# Altium PCB RelayBoard.PcbDoc
Units mil, origin at the board's own origin, x right, y up, seen from the top; angles counter-clockwise.
Board outline 3700.79 x 5314.96 mil, 2 copper layers (Top Layer, Bottom Layer); 22 components, 39 nets, 78 pads, 0 vias.
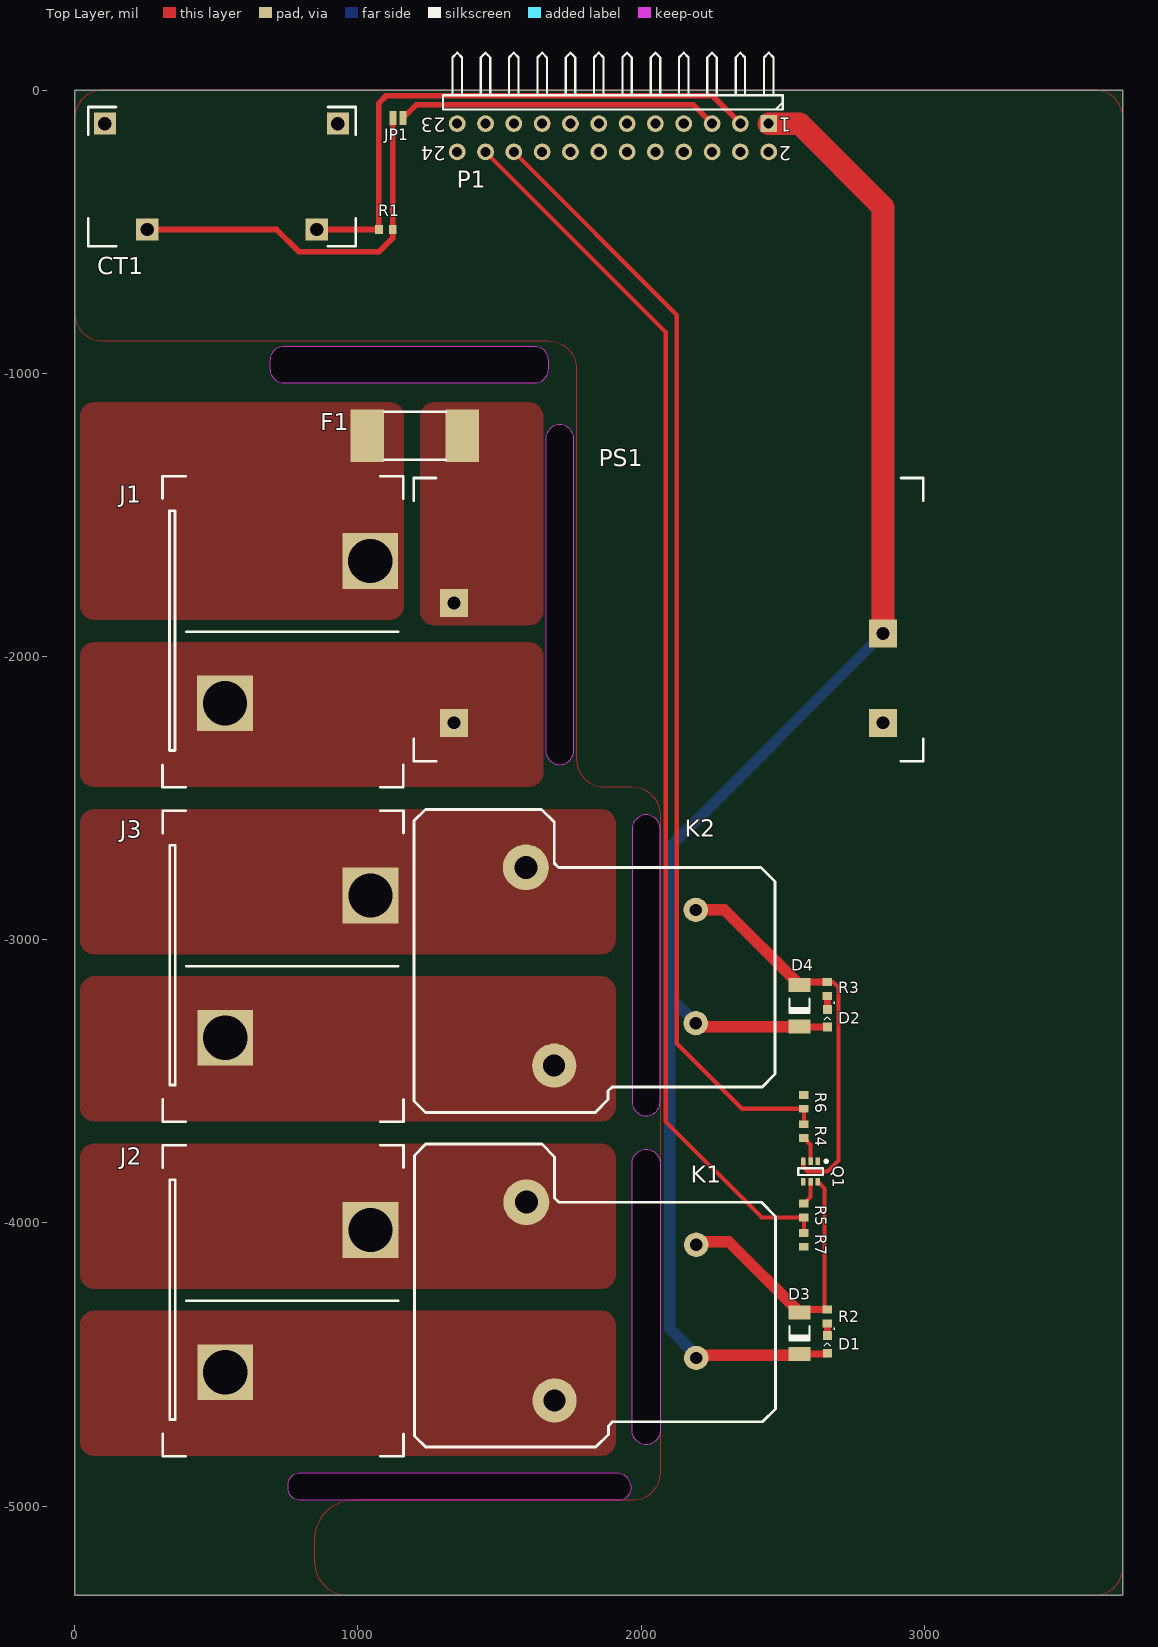
[diagram p0: Top Layer view]
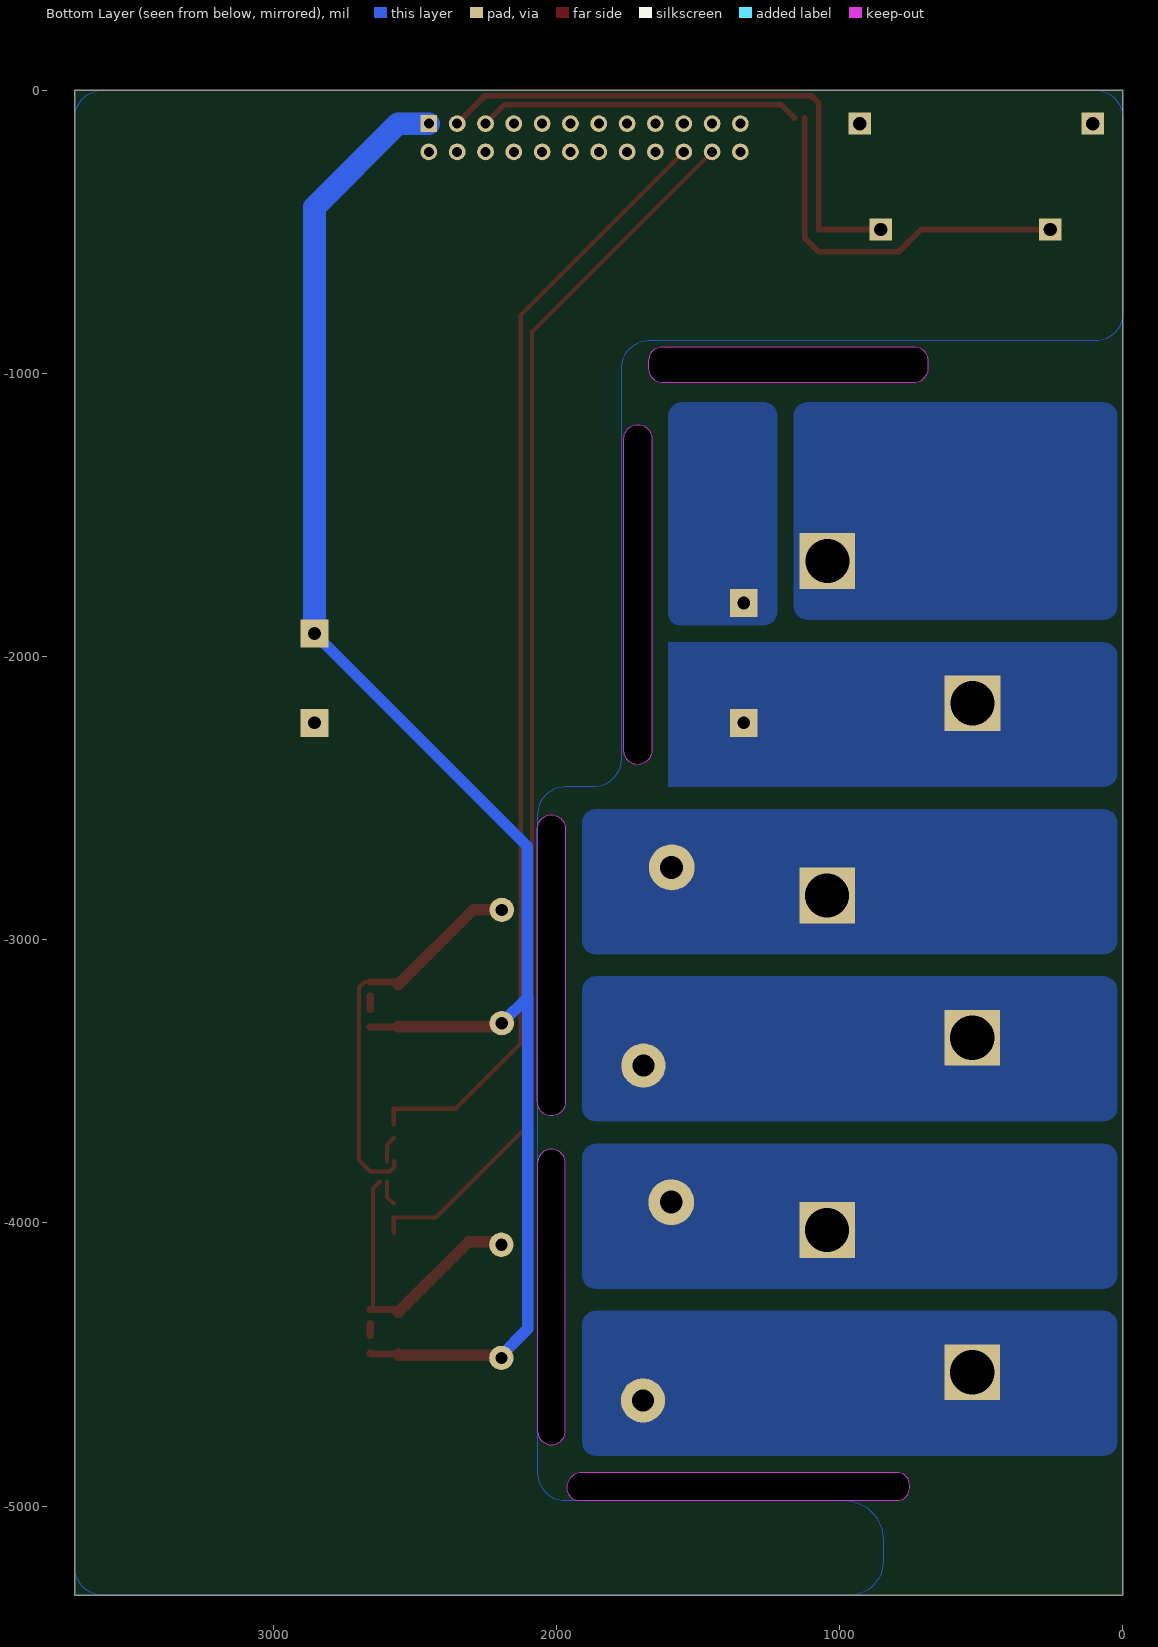
[diagram p1: Bottom Layer view, seen from below]

## Layer stack, top to bottom
Top Solder: solder mask 0.4, Solder Resist, Dk 3.5
Top Layer: signal copper 1.4
Dielectric 1: dielectric 12.6, FR-4, Dk 4.8
Bottom Layer: signal copper 1.4
Bottom Solder: solder mask 0.4, Solder Resist, Dk 3.5

## Board outline
0,0 3700.79,0 3700.79,-5314.96 0,-5314.96
cut-out: -8015.75,-5388.78 -8015.75,-5389.76 -8012.8,-5386.81 -8010.83,-5386.81 -8011.81,-5385.83
cut-out: 2066.93,-3789.37 2066.93,-4734.25 cw(c2017.72,-4734.25) 2017.72,-4783.46 cw(c2017.72,-4734.25) 1968.5,-4734.25 1968.5,-3789.37 cw(c2017.72,-3789.37) 2017.72,-3740.16 cw(c2017.72,-3789.37)
cut-out: 2017.72,-3622.05 ccw(c2017.72,-3572.84) 2066.93,-3572.83 2066.93,-2608.27 ccw(c2017.72,-2608.27) 2017.72,-2559.06 ccw(c2017.72,-2608.27) 1968.5,-2608.27 1968.5,-3572.83 ccw(c2017.72,-3572.84)
cut-out: 797.24,-4881.89 1909.45,-4881.89 cw(c1909.45,-4936.02) 1963.58,-4936.02 cw(c1919.29,-4936.02) 1919.29,-4980.31 797.24,-4980.32 cw(c797.24,-4936.02) 752.95,-4936.02 752.95,-4926.18 cw(c797.24,-4926.18)
cut-out: 1712.6,-2381.89 ccw(c1712.6,-2332.68) 1761.81,-2332.68 1761.81,-1230.31 ccw(c1712.6,-1230.31) 1712.6,-1181.1 ccw(c1712.6,-1230.31) 1663.39,-1230.32 1663.39,-2332.68 ccw(c1712.6,-2332.68)
cut-out: 688.98,-954.72 688.98,-984.25 ccw(c738.19,-984.25) 738.19,-1033.46 1624.02,-1033.46 ccw(c1624.02,-984.25) 1673.23,-984.25 1673.23,-954.72 ccw(c1624.02,-954.72) 1624.02,-905.51 738.19,-905.51 ccw(c738.19,-954.72)

## Design rules (kind name [scope] priority, off if disabled: settings)
Clearance "Stitching GND" [IsStitchingVia and InNet('GND') vs (IsVia and (Not IsStitchingVia)) Or IsPad] p1: gap=12 ignorepadtopadclearanceinfootprint=FALSE
Clearance [All] p2: gap=6 ignorepadtopadclearanceinfootprint=FALSE except(0: Arc-Hole Track-Hole SMDPad-Hole THPad-Hole Via-Hole Fill-Hole Poly-Hole Region-Hole Text-Hole)
Clearance Clearance_HV_300V [All vs InNet('NetJ3_1') OR InNet('NetJ3_2') OR InNet('NetJ4_1') OR InNet('NetJ4_2') OR InNet('NetJ1_2') OR InNet('NetF1_1') OR InNet('NetF1_2')] p3: gap=15.75 ignorepadtopadclearanceinfootprint=FALSE except(0: Arc-Hole Track-Hole SMDPad-Hole THPad-Hole Via-Hole Fill-Hole Poly-Hole Region-Hole Text-Hole)
HoleSize [All] p1: absolutevalues=TRUE maxlimit=100 minlimit=11.81 maxpercent=80.000 minpercent=20.000
PolygonConnect [All] p1: connectstyle=Direct reliefconductorwidth=20 reliefentries=4 polygonreliefangle="45 Angle" airgapwidth=10
RoutingVias [All] p1: holewidth=11.81 width=50 viastyle="Through Hole" minholewidth=11.81 minwidth=50 maxholewidth=200 maxwidth=50
SolderMaskExpansion [All] p1: expansion=4
Width [All] p1: maxlimit=100 minlimit=6 preferedwidth=10
Width Width_HV_1A [InNet('NetJ1_2') OR InNet('NetF1_1') OR InNet('NetF1_2')] p2: maxlimit=30 minlimit=14 preferedwidth=14
Width Width_HV_20A_Multilayer [InNet('NetJ1_2') OR InNet('NetF1_1') OR InNet('NetF1_2')] p3: maxlimit=700 minlimit=500 preferedwidth=500
29 further rules are at their usual default settings.

## Components (designator, comment, footprint, x,y, rotation, side; value= is the part's Value field where it differs from the comment)
CT1 "Current Transformer" CT-CR8348 854.33,-492.13 r180 top
D1 "Led Red" "LED-0603 .7MM TALL" 2657.48,-4429.13 r270 top
D2 "Led Red" "LED-0603 .7MM TALL" 2657.48,-3277.56 r270 top
D3 "Diode" "SOD-80  MiniMELF" 2559.06,-4389.76 r90 top
D4 "Diode" "SOD-80  MiniMELF" 2559.06,-3233.27 r90 top
F1 "Fuse 500mA" "FUSE M10742X40L Schurter UMK 250 Series" 1200.79,-1220.47 r0 top
J1 "High Voltage Connector" "2POS Barrier Block Terminal" 1043.31,-1662.75 r270 top
J2 "High Voltage Connector" "2POS Barrier Block Terminal" 1044.01,-4024.96 r270 top (schematic designator J3)
J3 "High Voltage Connector" "2POS Barrier Block Terminal" 1044.01,-2843.85 r270 top (schematic designator J4)
JP1 "JUMPER-PAD-2-NO" PAD-JUMPER-2-NO_NO_SILK 1141.73,-98.43 r180 top
K1 "Power Relay" T9AS1D12-5 1919.49,-4252.17 r90 top
K2 "Power Relay" T9AS1D12-5 1917.91,-3069.88 r90 top
P1 "Header 12X2H" HDR2X12H 2450.39,-118.11 r180 top
PS1 "AC/DC Power Supply" IRM-10-5 1196.85,-1370.08 r0 top
Q1 "NPN MOSFET" "SC-70-6  (SOT-363)" 2598.43,-3818.9 r270 top
R1 "VAL?" "RESC1608X06L - RES0603" 1098.43,-492.13 r180 top (schematic designator R5)
R2 "150" "RESC1608X06L - RES0603" 2657.48,-4330.71 r270 top (schematic designator R1)
R3 "150" "RESC1608X06L - RES0603" 2657.48,-3174.21 r270 top (schematic designator R2)
R4 "1K" "RESC1608X06L - RES0603" 2574.8,-3676.18 r270 top
R5 "1K" "RESC1608X06L - RES0603" 2574.8,-3956.69 r90 top
R6 "10K" "RESC1608X06L - RES0603" 2574.8,-3572.83 r270 top
R7 "10K" "RESC1608X06L - RES0603" 2574.8,-4060.04 r90 top

## Footprints (in the part's own frame and the unit in brackets; to place one, negate y for a bottom-side part, rotate by r counter-clockwise, add the part's x,y. Pads: shape width x height; smd on the part's side, far side on the other; paste and mask are expansions set on the pad)
"2POS Barrier Block Terminal" [mm] "CONN BARRIER STRIP 2CIRC 0.5\""
  rect 5x5 hole 3.96: 1(0,0) 2(12.766,-13.018)
  silkscreen extent -7.6,-18.63 20.3,2.97, body extent -7.64,-18.62 20.3,2.97, height 22.61
CT-CR8348 [mm] "TRANSF CURRENT .27\" OPENING PCB CR8348-2000"
  rect 2x2 hole 1.2: 1(0,0) 2(15.2,0) ""(-1.9,-9.5) ""(19,-9.5)
  silkscreen extent -3.5,-11 20.5,1.5, body extent -3.5,-10.1 20.5,0.6, height 25
"FUSE M10742X40L Schurter UMK 250 Series" [mm] "Molded Capacitor, 2-Leads, Body 10.70x4.20mm, IPC High Density"
  rect 3x4.7 smd: 1(-4.25,0) 2(4.25,0)
  silkscreen extent -2.77,-2.15 2.78,2.15, body extent -5.65,-2.11 5.65,2.09, height 3.97
HDR2X12H [mm] "Connector; Header; 12x2 Position; Right Angle"
  rect 1.5x1.5 hole 0.9: 1(0,0)
  round 1.5 hole 0.9: 2(0,2.54) 3(2.54,0) 4(2.54,2.54) 5(5.08,0) 6(5.08,2.54) 7(7.62,0) 8(7.62,2.54) 9(10.16,0) 10(10.16,2.54) 11(12.7,0) 12(12.7,2.54) 13(15.24,0) 14(15.24,2.54) 15(17.78,0) 16(17.78,2.54) 17(20.32,0) 18(20.32,2.54) 19(22.86,0) 20(22.86,2.54) 21(25.4,0) 22(25.4,2.54) 23(27.94,0) 24(27.94,2.54)
  silkscreen extent -1.27,-6.35 29.21,-1.27
IRM-10-5 [mm] "AC/DC Power Modules 5V 2A 10W 85-264Vin Encap PS"
  rect 2.5x2.5 hole 1.15: AC/L(3.6,-21.95) AC/N(3.6,-11.2) V+(42.1,-13.95) V-(42.1,-21.95)
  silkscreen extent 0,-25.4 45.7,0, body extent 0,-25.4 45.7,0, height 21.5
"LED-0603 .7MM TALL" [mm] "Chip Diode, 2-Leads, Body 1.60x0.80mm, IPC High Density"
  rect 0.8x0.8 smd: A(0.8,0) K(-0.8,0)
  silkscreen extent -1.45,-0.25 0.13,0.68, body extent -1.01,-0.54 1.01,0.53, height 0.6
PAD-JUMPER-2-NO_NO_SILK [mil]
  rect 25x50 smd: 1(-17.72,0) 2(17.72,0)
"RESC1608X06L - RES0603" [mm] "Chip Resistor, 2-Leads, Body 1.60x0.80mm, IPC High Density"
  rect 0.7x0.85 smd: 1(-0.625,0) 2(0.625,0)
  body extent -0.87,-0.48 0.87,0.48, height 0.55
"SC-70-6  (SOT-363)" [mm] "TSOP, 6-Leads, Body 2.00x1.25mm, Pitch 0.65mm, IPC High Density"
  rect 0.648x0.406 smd: 1(-0.919,0.65) 2(-0.919,0) 3(-0.919,-0.65) 4(0.919,-0.65) 5(0.919,0) 6(0.919,0.65)
  silkscreen extent -1.04,-1.1 0.3,1.53, body extent -1.05,-1.1 1.05,1.1, height 1
"SOD-80  MiniMELF" [mm] "MELF Diode, 2-Leads, Body 3.50x1.50mm, IPC High Density"
  rect 1.25x2 smd: 1(-1.875,0) 2(1.875,0)
  silkscreen extent -0.65,-0.9 0.65,0.9, body extent -1.75,-0.75 1.75,0.75, height 1.5
T9AS1D12-5 [mil] "RELAY GEN PURPOSE SPST 30A 5V"
  round 162 hole 81: 1(325,325)
  round 156 hole 78: 2(-375,225)
  round 86 hole 43: 3(175,-275) 4(-225,-275)
  silkscreen extent -540,-555 530,720, body extent -545,-555 535,725, height 806

## Part data
CT1: library part "CT CR8348-2000", "TRANSF CURRENT .27\" OPENING PCB 50A", Supplier Part Number 1=582-1010-ND, Supplier 1=Digi-Key, url=https://www.digikey.com/product-detail/en/cr-magnetics-inc/CR8348-2000/582-1010-ND/1045166
D1 D2: library part "LED0603 RED 20mA 250mcd", "LED RED CLEAR 0603 SMD 250 mcd", Supplier Part Number 1=732-4978-1-ND, Supplier 1=Digi-Key
D3 D4: library part "Diode LL4150GS18", "DIODE GEN 50V 600MA MINI MELF", Supplier Part Number 1=LL4150GS18GICT-ND, Supplier 1=Digi-Key
F1: library part FUSE-Schurter-3404.2463.22, "FUSE UMK 250 FUSE WITH HOLDER 500MA F", Supplier Part Number 1=486-3187-1-ND, Supplier 1=Digi-Key, url=https://www.digikey.com/product-detail/en/3404.2463.22/486-3187-1-ND/5225261?curr=usd&WT.z_cid=ref_octopart_dkc_buynow&site=us
J1 J2 J3: library part "2POS CONN BARRIER STRIP 2CIRC 0.5\" 45A 600V", "MOLEX  0386608802", Supplier Part Number 1=WM4395-ND, Supplier 1=Digi-Key, url=http://www.mouser.com/ProductDetail/Molex/38660-8802/?qs=sGAEpiMZZMsntO7gZZwOWBznzzIjRi3IH61qEmgvOKA%3d
K1 K2: library part T9AS1D12-5, "Single-Pole Single-Throw Relay", Supplier Part Number 1=PB1014-ND, Part Number=T9AS1D12-5, Supplier 1=Digi-Key
P1: "Header, 12-Pin, Dual row, Right Angle", LatestRevisionDate=17-Jul-2002, LatestRevisionNote="Re-released for DXP Platform.", Publisher="Altium Limited"
PS1: library part IRM-10-5, "AC/DC Power Modules 5V 2A 10W 85-264Vin Encap PS", Supplier Part Number 1=70387823, Mouser Link=http://www.mouser.com/ProductDetail/Mean-Well/IRM-10-5/?qs=sGAEpiMZZMuWiaalG5TUgH52QN1%252bIKAVGLeN4i9HrWU2QI8q%2fOO4Cw%3d%3d, Supplier 1=Allied
Q1: library part SI1922EDH-T1-GE3CT, "2N-CH NPN MOSFET 20V 1.3A SOT-363", Supplier Part Number 1=SI1922EDH-T1-GE3CT-ND, Supplier 1=Digi-Key
R1: library part RES0603, "SMT 0603 Ceramic Resistor"
R2 R3: library part "RES0603 150 1% 1/10W_1", "SMT 0603 Ceramic Resistor", Supplier Part Number 1=311-150HRCT-ND, Supplier 1=Digi-Key
R4 R5: library part "RES0603 1K 1% 1/10W", "SMT 0603 Ceramic Resistor", Power=1/10W, Supplier Part Number 1=311-1.00KHRCT-ND, Tolerance=1%, Supplier 1=Digi-Key, Supplier 2=Digi-Key, Supplier 3=Digi-Key, Supplier Part Number 2=P1.00KHCT-ND, Supplier Part Number 3=RMCF0603FG1K00CT-ND
R6 R7: library part "RES0603 10K 1% 1/10W", "SMT 0603 Ceramic Resistor", Power=1/10W, Supplier Part Number 1=311-10.0KHRCT-ND, Tolerance=1%, Supplier 1=Digi-Key, Supplier 2=Digi-Key, Supplier 3=Digi-Key, Supplier Part Number 2=RMCF0603FT10K0CT-ND, Supplier Part Number 3=P10.0KHCT-ND

## Nets (pads, with @x,y where several pads share a name; then routed paths per layer and width w, separated by ;. In a path a pad name is that pad's centre, name@x,y a point inside that pad or via, vN(x,y) a via of type N, cw(c..) or ccw(c..) an arc to the next point about the centre after c; other vN are vias at no path point)
3.3V: P1.2
5V: D1.A D2.A D3.1 D4.1 K1.4 K2.4 P1.1 PS1.V+ | length 3982.8
  Top Layer w10: D4.1@2541.34,-3309.06 2561.02,-3309.06 D4.1@2560.73,-3309.28
  Top Layer w25: D3.1 2654.53,-4463.58 D1.A ; D4.1@2561.02,-3309.06 D2.A
  Top Layer w40: K2.4 2205.63,-3307.6 2559.06,-3307.6 D4.1 ; K1.4@2194.49,-4467.32 2555.31,-4467.32 D3.1
  Bottom Layer w40: K2.4 2102.57,-3204.54 ; K1.4@2194.49,-4467.32 2101.38,-4374.21 2101.38,-3203.35 2102.57,-3204.54 ; PS1.V+ 2102.57,-2671.05 2102.57,-3204.54
60HzAnt: P1.21
AIN0: 
AIN1: 
CT_N: JP1.1 P1.5 | length 1138.2
  Top Layer w20: JP1.1 1206.7,-51.18 2183.46,-51.18 P1.5
CT_P: CT1.1 P1.3 R1.2 | length 2021.5
  Top Layer w10: CT1.1@826.77,-492.13 CT1.1
  Top Layer w20: CT1.1 R1.2 1073.82,-45.83 1099.96,-19.68 2251.97,-19.68 P1.3
GND: P1.23 P1.24 PS1.V- Q1.1 Q1.4 R6.1 R7.1 | length 13.9
  Top Layer w10: PS1.V- PS1.V-@2864.17,-2244.09
GPIO1: P1.8
GPIO2: P1.10
GPIO3: P1.12
GPIO4: P1.14
GPIO5: P1.16
GPIO6: P1.18
GPIO7: P1.20 R4.1 R6.2 | length 3985.2
  Top Layer w15: P1.20 2125.98,-793.7 2125.98,-3366.14 2357.28,-3597.44 R6.2 R4.1
GPIO8: P1.22 R5.1 R7.2 | length 4370.1
  Top Layer w15: P1.22 2086.61,-854.33 2086.61,-3641.73 2426.18,-3981.3 R5.1 R7.2
I2C_SCL: P1.6
I2C_SDA: P1.4
Leak_N: P1.13
Leak_P: P1.11
Mic_In: P1.15
NetCT1_2: CT1.2 JP1.2 R1.1 | length 1343.9
  Top Layer w20: CT1.2 712.6,-492.13 791.34,-570.87 1074.8,-570.87 1123.03,-522.64 R1.1 JP1.2@1123.03,-98.43
NetD1_K: D1.K R2.2 | length 42.3
  Top Layer w25: D1.K R2.2
NetD2_K: D2.K R3.2 | length 47.2
  Top Layer w25: D2.K R3.2
NetD3_2: D3.2 K1.3 Q1.6 R2.1 | length 1034.9
  Top Layer w15: Q1.6 2647.64,-3878.7 2647.64,-4296.26 R2.1
  Top Layer w25: D3.2 2568.9,-4306.1 R2.1
  Top Layer w40: K1.3@2194.49,-4067.32 2310.43,-4067.32 D3.2
NetD4_2: D4.2 K2.3 Q1.3 R3.1 | length 1403.3
  Top Layer w10: D4.2 D4.2@2568.9,-3149.61
  Top Layer w15: Q1.3 2572.83,-3803.15 2588.58,-3818.9 2657.48,-3818.9 2696.85,-3779.53 2696.85,-3169.29 2677.17,-3149.61 R3.1
  Top Layer w25: D4.2@2568.9,-3149.61 R3.1
  Top Layer w40: K2.3 2294.49,-2894.88 D4.2
NetF1_1: F1.1 J1.1 | length 55.7
  Top Layer w10: J1.1@1003.94,-1623.38 J1.1
NetF1_2: F1.2 PS1.AC/N
NetJ1_2: J1.2 PS1.AC/L
NetJ2_1: J2.1 K1.1
NetJ2_2: J2.2 K1.2
NetJ3_1: J3.1 K2.1
NetJ3_2: J3.2 K2.2
NetQ1_2: Q1.2 R4.2 | length 91.7
  Top Layer w15: R4.2 2598.43,-3724.41 Q1.2
NetQ1_5: Q1.5 R5.2 | length 86.8
  Top Layer w15: R5.2 2598.43,-3908.46 Q1.5
RFU1: P1.17
RFU2: P1.19
RS4855_A: P1.9
RS4855_B: P1.7
pads on no net: CT1.
copper on no net: | length 11.8
  Top Layer w10: 1456.69,-236.22 1468.5,-236.22

## Polygon pours and split planes (outlines as drawn)
GND on Top Layer "NONET_L01_P052" (solid, remove dead copper, shelved, pour order 52): 0,-98.43 0,-787.4 ccw(c98.42,-787.41) 98.42,-885.83 1673.23,-885.83 cw(c1673.23,-984.25) 1771.65,-984.25 1771.65,-2362.2 ccw(c1870.08,-2362.2) 1870.08,-2460.63 1968.5,-2460.63 cw(c1968.51,-2559.05) 2066.93,-2559.05 2066.93,-4881.89 cw(c1968.5,-4881.89) 1968.51,-4980.31 984.25,-4980.32 ccw(c984.25,-5118.11) 846.46,-5118.11 846.46,-5196.85 ccw(c964.57,-5196.85) 964.57,-5314.96 3602.36,-5314.96 ccw(c3602.36,-5216.54) 3700.79,-5216.54 3700.79,-98.43 ccw(c3602.37,-98.42) 3602.36,0 98.42,0 ccw(c98.42,-98.42)
NetF1_2 on Top Layer "NETF1_2_L01_P045" (solid, pour order 45): 1269.68,-1889.76 1604.33,-1889.76 ccw(c1604.33,-1840.55) 1653.54,-1840.55 1653.54,-1151.58 ccw(c1604.33,-1151.58) 1604.33,-1102.36 1269.68,-1102.36 ccw(c1269.68,-1151.57) 1220.47,-1151.58 1220.47,-1840.55 ccw(c1269.68,-1840.55)
NetJ2_2 on Top Layer "NETJ2_2_L01_P051" (solid, pour order 51): 1860.24,-4311.02 68.9,-4311.02 ccw(c68.9,-4360.24) 19.68,-4360.24 19.68,-4773.62 ccw(c68.9,-4773.62) 68.9,-4822.83 1860.24,-4822.83 ccw(c1860.24,-4773.62) 1909.45,-4773.62 1909.45,-4360.24 ccw(c1860.24,-4360.24)
NetJ2_1 on Top Layer "NETJ2_1_L01_P050" (solid, pour order 50): 68.9,-3720.47 1860.24,-3720.47 cw(c1860.24,-3769.69) 1909.45,-3769.69 1909.45,-4183.07 cw(c1860.24,-4183.07) 1860.24,-4232.28 68.9,-4232.28 cw(c68.9,-4183.07) 19.68,-4183.07 19.68,-3769.69 cw(c68.9,-3769.69)
NetJ3_1 on Top Layer "NETJ3_1_L01_P048" (solid, pour order 48): 68.9,-2539.37 1860.24,-2539.37 cw(c1860.24,-2588.58) 1909.45,-2588.58 1909.45,-3001.97 cw(c1860.24,-3001.97) 1860.24,-3051.18 68.9,-3051.18 cw(c68.9,-3001.97) 19.69,-3001.97 19.69,-2588.58 cw(c68.9,-2588.58)
NetJ3_2 on Top Layer "NETJ3_2_L01_P049" (solid, pour order 49): 68.9,-3129.92 1860.24,-3129.92 cw(c1860.24,-3179.13) 1909.45,-3179.13 1909.45,-3592.52 cw(c1860.24,-3592.52) 1860.24,-3641.73 68.9,-3641.73 cw(c68.9,-3592.52) 19.69,-3592.52 19.68,-3179.13 cw(c68.9,-3179.13)
NetJ1_2 on Top Layer "NETJ1_2_L01_P046" (solid, pour order 46): 68.9,-1948.82 1604.33,-1948.82 cw(c1604.33,-1998.03) 1653.54,-1998.03 1653.54,-2411.42 cw(c1604.33,-2411.42) 1604.33,-2460.63 68.9,-2460.63 cw(c68.9,-2411.42) 19.68,-2411.42 19.68,-1998.03 cw(c68.9,-1998.03)
NetF1_1 on Top Layer "NETF1_1_L01_P047" (solid, pour order 47): 1161.42,-1820.87 1161.42,-1151.58 ccw(c1112.2,-1151.58) 1112.2,-1102.36 68.9,-1102.36 ccw(c68.9,-1151.57) 19.69,-1151.57 19.68,-1820.87 ccw(c68.9,-1820.87) 68.9,-1870.08 1112.2,-1870.08 ccw(c1112.2,-1820.87)
GND on Bottom Layer "NONET_L02_P060" (solid, remove dead copper, shelved, pour order 60): 0,-98.43 0,-787.4 ccw(c98.42,-787.41) 98.42,-885.83 1673.23,-885.83 cw(c1673.23,-984.25) 1771.65,-984.25 1771.65,-2362.2 ccw(c1870.08,-2362.2) 1870.08,-2460.63 1968.5,-2460.63 cw(c1968.51,-2559.05) 2066.93,-2559.05 2066.93,-4881.89 cw(c1968.5,-4881.89) 1968.51,-4980.31 984.25,-4980.32 ccw(c984.25,-5118.11) 846.46,-5118.11 846.46,-5196.85 ccw(c964.57,-5196.85) 964.57,-5314.96 3602.36,-5314.96 ccw(c3602.36,-5216.54) 3700.79,-5216.54 3700.79,-98.43 ccw(c3602.37,-98.42) 3602.36,0 98.42,0 ccw(c98.42,-98.42)
NetF1_2 on Bottom Layer "NETF1_2_L02_P053" (solid, pour order 53): 1604.33,-1151.58 1604.33,-1850.39 cw(c1564.96,-1850.39) 1564.96,-1889.76 1269.68,-1889.76 cw(c1269.68,-1840.55) 1220.47,-1840.55 1220.47,-1151.57 cw(c1269.68,-1151.57) 1269.68,-1102.36 1555.12,-1102.36 cw(c1555.12,-1151.57)
NetF1_1 on Bottom Layer "NETF1_1_L02_P054" (solid, pour order 54): 1161.42,-1820.87 1161.42,-1151.57 ccw(c1112.2,-1151.57) 1112.2,-1102.36 68.9,-1102.36 ccw(c68.9,-1151.57) 19.68,-1151.57 19.68,-1820.87 ccw(c68.9,-1820.87) 68.9,-1870.08 1112.2,-1870.08 ccw(c1112.2,-1820.87)
NetJ1_2 on Bottom Layer "NETJ1_2_L02_P055" (solid, pour order 55): 1604.33,-2460.63 1604.33,-1948.82 68.9,-1948.82 ccw(c68.9,-1998.03) 19.68,-1998.03 19.68,-2411.42 ccw(c68.9,-2411.42) 68.9,-2460.63
NetJ3_1 on Bottom Layer "NETJ3_1_L02_P057" (solid, pour order 57): 1909.45,-3001.97 1909.45,-2588.58 ccw(c1860.24,-2588.58) 1860.24,-2539.37 68.9,-2539.37 ccw(c68.9,-2588.58) 19.68,-2588.58 19.68,-3001.97 ccw(c68.9,-3001.97) 68.9,-3051.18 1860.24,-3051.18 ccw(c1860.24,-3001.97)
NetJ3_2 on Bottom Layer "NETJ3_2_L02_P056" (solid, pour order 56): 1860.24,-3641.73 68.9,-3641.73 cw(c68.9,-3592.52) 19.68,-3592.52 19.68,-3179.13 cw(c68.9,-3179.13) 68.9,-3129.92 1860.24,-3129.92 cw(c1860.24,-3179.13) 1909.45,-3179.13 1909.45,-3592.52 cw(c1860.24,-3592.52)
NetJ2_1 on Bottom Layer "NETJ2_1_L02_P058" (solid, pour order 58): 1909.45,-3769.69 1909.45,-4183.07 cw(c1860.24,-4183.07) 1860.24,-4232.28 68.9,-4232.28 cw(c68.9,-4183.07) 19.68,-4183.07 19.68,-3769.68 cw(c68.9,-3769.69) 68.9,-3720.47 1860.24,-3720.47 cw(c1860.24,-3769.69)
NetJ2_2 on Bottom Layer "NETJ2_2_L02_P059" (solid, pour order 59): 1909.45,-4360.24 1909.45,-4773.62 cw(c1860.24,-4773.62) 1860.24,-4822.83 68.9,-4822.83 cw(c68.9,-4773.62) 19.69,-4773.62 19.68,-4360.24 cw(c68.9,-4360.24) 68.9,-4311.02 1860.24,-4311.02 cw(c1860.24,-4360.24)

## Other copper
Multi-Layer:
  lines w80 net 5V: 2450.39,-118.11 2559.06,-118.11 2854.33,-413.39 2854.33,-1919.29

## Text inside footprints (layer, text, board x,y; h text height)
P1: Top Overlay "1" at 2530.39,-98.11 h50 r180; Top Overlay "2" at 2530.39,-198.11 h50 r180; Top Overlay "23" at 1310.39,-98.11 h50 r180; Top Overlay "24" at 1310.39,-198.11 h50 r180